# Altium PCB bt-bezel-pvt2a_final_mp.PcbDoc
Units mm, origin at the board's own origin, x right, y up, seen from the top; angles counter-clockwise.
Board outline 65.7 x 134.7 mm, 2 copper layers (Top Layer, Bottom Layer), stack 1.571 mm thick; 5 components, 3 nets, 246 pads, 2 vias.
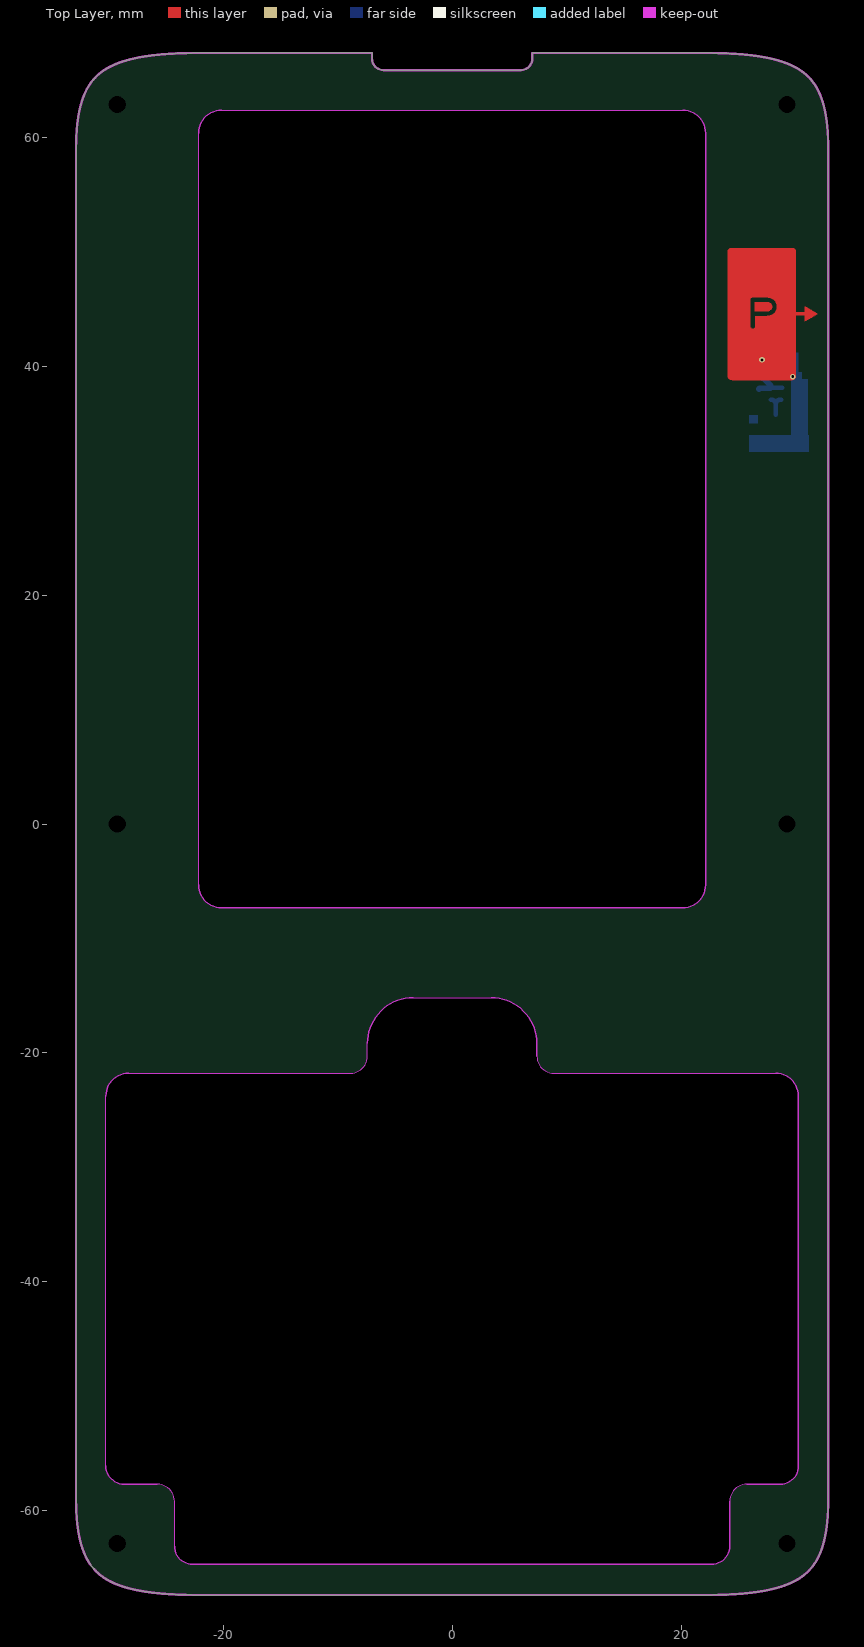
[diagram p0: Top Layer view]
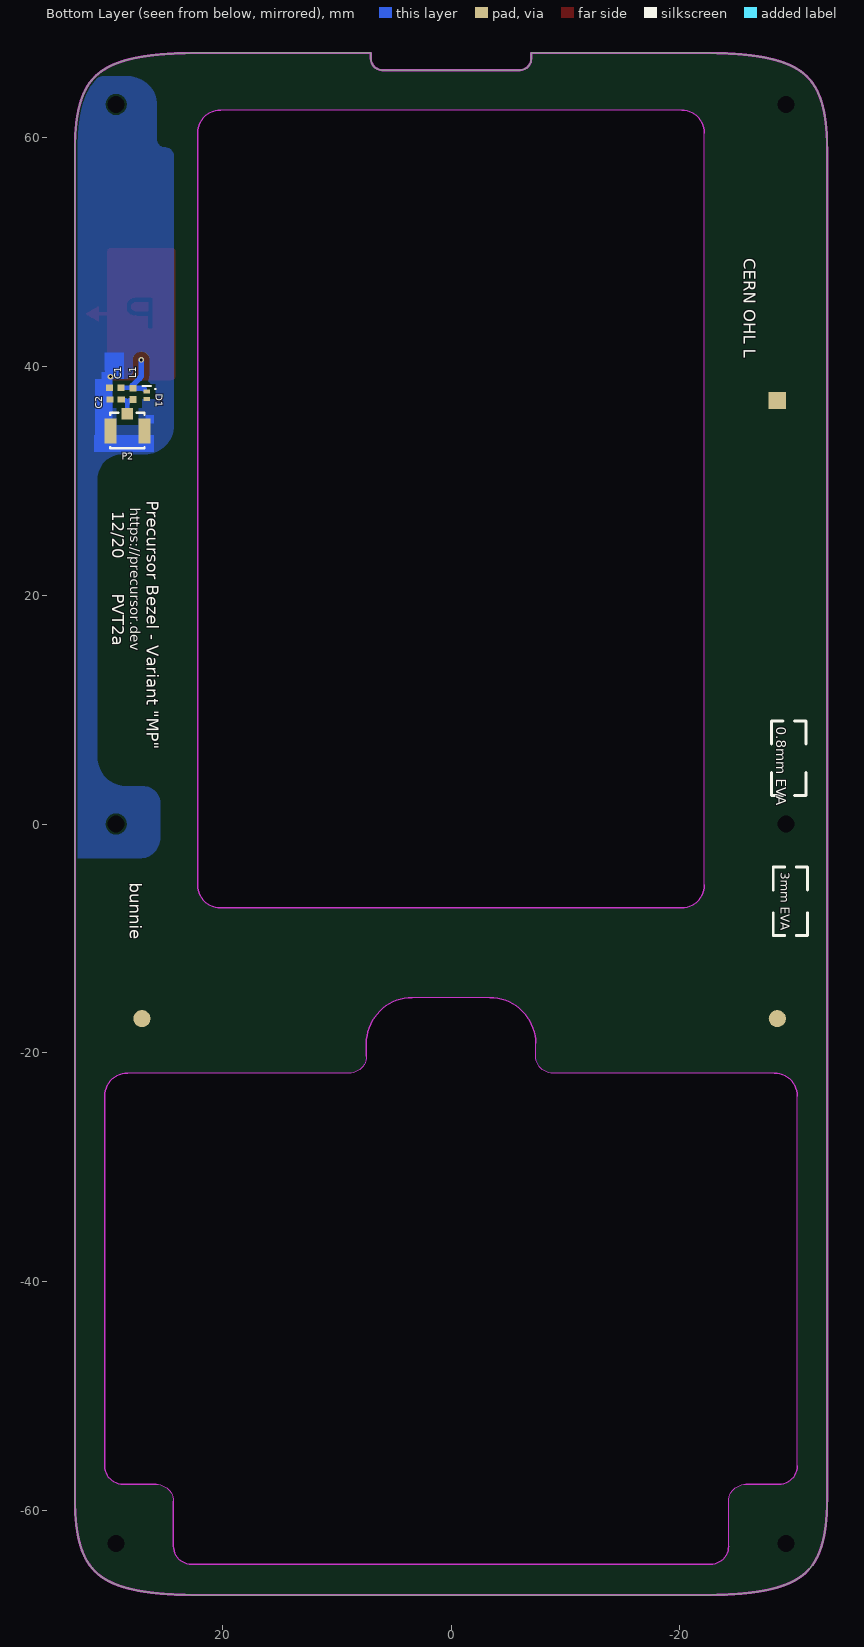
[diagram p1: Bottom Layer view, seen from below]

## Layer stack, top to bottom
Top Layer: signal copper 0.0356
Light blocking FR-4: dielectric 1.5, FR-4, Dk 4.8
Bottom Layer: signal copper 0.0356
Bottom Solder: solder mask 0.0102, Solder Resist, Dk 3.5

## Board outline
1504 vertices, not listed, extent -32.85,-67.35 32.85,67.35
cut-out: -22.136,-5.322 -22.136,60.35 cw(c-20.136,60.35) -20.136,62.35 20.136,62.35 cw(c20.136,60.35) 22.136,60.35 22.136,-5.322 cw(c20.136,-5.322) 20.136,-7.322 -20.136,-7.322 cw(c-20.136,-5.322)
cut-out: -24.25,-63.07 -24.25,-59.17 ccw(c-25.75,-59.17) -25.75,-57.67 -28.65,-57.67 cw(c-28.65,-56.07) -30.25,-56.07 -30.25,-23.77 cw(c-28.25,-23.77) -28.25,-21.77 -8.9,-21.77 ccw(c-8.9,-20.27) -7.4,-20.27 -7.4,-19.17 cw(c-3.4,-19.17) -3.4,-15.17 3.4,-15.17 cw(c3.4,-19.17) 7.4,-19.17 7.4,-20.27 ccw(c8.9,-20.27) 8.9,-21.77 28.25,-21.77 cw(c28.25,-23.77) 30.25,-23.77 30.25,-56.07 cw(c28.65,-56.07) 28.65,-57.67 25.75,-57.67 ccw(c25.75,-59.17) 24.25,-59.17 24.25,-63.07 cw(c22.65,-63.07) 22.65,-64.67 -22.65,-64.67 cw(c-22.65,-63.07)

## Design rules (kind name [scope] priority, off if disabled: settings)
Clearance Clearance_1 [InNetClass('RF') vs InNet('GND')] p1: gap=0.45 ignorepadtopadclearanceinfootprint=FALSE except(0: Arc-Hole Track-Hole SMDPad-Hole THPad-Hole Via-Hole Fill-Hole Poly-Hole Region-Hole Text-Hole)
Clearance [All] p2: gap=0.15 ignorepadtopadclearanceinfootprint=FALSE except(0: Arc-Hole Track-Hole SMDPad-Hole THPad-Hole Via-Hole Fill-Hole Poly-Hole Region-Hole Text-Hole)
ComponentClearance [All] p1 off: gap=0.254 collisioncheckmode=3 verticalgap=0.254 showdistances=FALSE
Height [All] p1 off: minheight=0 maxheight=25.4 prefheight=12.7
PolygonConnect [All] p1: connectstyle=Direct reliefconductorwidth=0.254 reliefentries=4 polygonreliefangle="90 Angle" airgapwidth=0.254
RoomDefinition connectors [InComponentClass('connectors')] p1 off: confinementstyle=ConfineIn formatcopy=TRUE lockcomponents=FALSE outline 34.001,-65.945 33.5,-65.945 33.5,-39.945 34.001,-39.945
RoutingVias [All] p1: holewidth=0.25 width=0.5 viastyle="Through Hole" minholewidth=0.25 minwidth=0.5 maxholewidth=0.5 maxwidth=1
SilkToSilkClearance [All] p1 off: silktosilkclearance=0.254
SolderMaskExpansion [All] p1: expansion=0.102 istentingtop=FALSE
Width [All] p1: maxlimit=5 minlimit=0.15 preferedwidth=0.15 minimp=50.000000 maximp=50.000000 favimp=50.000000
27 further rules are at their usual default settings.

## Classes and differential pairs
net class RF: ANT1 FEED1
component class connectors: C1 C2 D1 P2

## Components (designator, comment, footprint, x,y, rotation, side; value= is the part's Value field where it differs from the comment)
C1 "3.9pF, NP0" B_CAP0402 29.335,38.111 r0 bottom
C2 "3.3pF, NP0" B_CAP0402 29.3,37.075 r0 bottom
D1 "TPD1E01B04DPYT" TI_PX1SON-N2 26.575,37.45 r270 bottom
L1 "1.0nH" B_IND0402 27.775,37.575 r270 bottom
P2 "U.FL-R-SMT-1(10)" HRS_U.FL 28.266,34.316 r0 bottom

## Footprints (in the part's own frame and the unit in brackets; to place one, negate y for a bottom-side part, rotate by r counter-clockwise, add the part's x,y. Pads: shape width x height; smd on the part's side, far side on the other; paste and mask are expansions set on the pad)
B_CAP0402 [mm] "Capacitor 0402"
  rect 0.63x0.55 smd mask+0.07: 1(-0.5,0) 2(0.5,0)
  body extent -0.53,-0.27 0.53,0.28, height 0.4
B_IND0402 [mm] "Inductor 0402"
  rect 0.58x0.64 smd: 1(-0.49,0) 2(0.49,0)
  body extent -0.55,-0.3 0.55,0.3, height 0.6
HRS_U.FL [mm] "6 GHz U.FL connector (ISM band antennas)"
  rect 1.05x2.2 smd: GND(-1.475,0) GND(1.475,0)
  rect 1x1 smd: SIG(0,-1.5)
  silkscreen extent -1.5,-1.6 1.5,1.5, body extent -1.5,-1.6 1.5,1.5, height 1.24
TI_PX1SON-N2 [mm] "TI 0402 SON diode footprint"
  rect 0.35x0.6 smd mask+0.05: 1(0.325,0) 2(-0.325,0)
  silkscreen extent -0.8,-0.34 -0.5,0.8, body extent -0.55,-0.35 0.55,0.35, height 0.45

## Part data
C1: library part "Cap Semi", "Capacitor (Semiconductor SIM Model)", MPN=CL05C3R9CB5NNNC, MYPN=C-3p9-50-NP0-0402, VENDOR=Samsung
C2: library part "Cap Semi", "Capacitor (Semiconductor SIM Model)", MPN=GRM1555C1H3R3CA01D, MYPN=C-3p3-50-NP0-0402, VENDOR=Murata
D1: library part "D Zener", "CPDUR24V", LatestRevisionDate=17-Jul-2002, LatestRevisionNote="Re-released for DXP Platform.", MPN=TPD1E01B04DPYT, MYPN=D-TPD1E01B04DPYT, PackageDescription="Diode, Thru-Hole; 2 Leads; 0.7 in Pin Spacing", PackageReference=DIODE-0.7, Published=8-Jun-2000, Publisher="Altium Limited", VENDOR=TI
L1: library part Inductor, "Inductor", MPN=LQG15HS1N0S02D, Code_IEC=1005, Code_JEITA=0402, LatestRevisionDate=29-May-2009, LatestRevisionNote="IPC-7351 Footprint Added.", MYPN=L-1p0NH-0402, PackageDescription="Chip Inductor", PackageReference=0402-A, Published=8-Jun-2000, Publisher="Altium Limited", VENDOR=Murata
P2: library part BNC, "BNC Elbow Connector", LatestRevisionDate=17-Jul-2002, LatestRevisionNote="Re-released for DXP Platform.", MPN=U.FL-R-SMT-1(10), MYPN=J-U.FL-SMT, Publisher="Altium Limited", VENDOR=HRS

## Free pads (board coordinates)
  round 1 hole 1.5 unplated mask+0.07: 0(-29.25,-62.85) 0(-29.25,0) 0(-29.25,62.85) 0(29.25,-62.85) 0(29.25,0) 0(29.25,62.85)
  rect 1.5x1.5 smd far side mask+1.5: 0(-28.5,37)
  rect 0.051x0.864 on Bottom Overlay: 1(-31.501,53.058) 1(-30.434,55.141) 1(-30.434,50.975) 1(-25.506,50.975) 1(-25.506,55.141)
  rect 0.051x0.965 on Bottom Overlay: 1(-31.45,53.058) 1(-31.399,53.058) 1(-31.348,53.058) 1(-30.383,50.975) 1(-30.383,55.141)
  rect 0.051x1.016 on Bottom Overlay: 1(-31.297,53.033) 1(-25.557,51.001) 1(-25.557,55.115)
  rect 0.051x1.067 on Bottom Overlay: 1(-31.247,53.058) 1(-31.196,53.058) 1(-31.145,53.058) 1(-31.094,53.058) 1(-31.043,53.058)
  rect 0.051x1.118 on Bottom Overlay: 1(-30.993,53.033) 1(-30.332,51.001) 1(-30.332,55.115) 1(-25.608,51.001) 1(-25.608,55.115)
  rect 0.051x1.168 on Bottom Overlay: 1(-30.942,53.058) 1(-30.891,53.058) 1(-30.84,53.058) 1(-30.789,53.058)
  rect 0.051x0.102 on Bottom Overlay: 1(-30.739,50.899) 1(-30.739,55.217) 1(-25.506,54.15) 1(-25.506,51.966)
  rect 0.051x1.219 on Bottom Overlay: 1(-30.739,53.033) 1(-30.281,55.115) 1(-30.281,51.001)
  rect 0.051x0.254 on Bottom Overlay: 1(-30.688,50.924) 1(-30.688,55.192) 1(-25.557,51.94) 1(-25.557,54.176) 1(-25.252,50.924) 1(-25.252,55.192)
  rect 0.051x1.27 on Bottom Overlay: 1(-30.688,53.058) 1(-30.637,53.058) 1(-30.586,53.058) 1(-30.535,53.058)
  rect 0.051x0.356 on Bottom Overlay: 1(-30.637,50.924) 1(-30.637,55.192) 1(-25.608,54.226) 1(-25.608,51.89) 1(-25.303,50.924)
  rect 0.051x0.457 on Bottom Overlay: 1(-30.586,50.924)
  rect 0.051x0.508 on Bottom Overlay: 1(-30.586,55.166) 1(-25.354,50.95) 1(-25.354,55.166)
  rect 0.051x0.61 on Bottom Overlay: 1(-30.535,50.95) 1(-30.535,55.166) 1(-25.405,50.95)
  rect 0.051x1.473 on Bottom Overlay: 1(-30.485,53.058)
  rect 0.051x0.762 on Bottom Overlay: 1(-30.485,55.141) 1(-25.455,50.975) 1(-25.455,55.141)
  rect 0.051x0.711 on Bottom Overlay: 1(-30.485,50.95)
  rect 0.051x1.727 on Bottom Overlay: 1(-30.434,53.033) 1(-26.624,54.506) 1(-26.624,51.61) 1(-26.573,51.61) 1(-26.573,54.506) 1(-26.522,54.506) 1(-26.471,51.559) 1(-26.471,54.557) 1(-26.37,54.607) 1(-26.37,51.509) 1(-25.659,54.861)
  rect 0.051x1.981 on Bottom Overlay: 1(-30.383,53.058) 1(-28.859,54.531) 1(-28.859,51.585) 1(-27.081,51.534) 1(-27.081,54.582)
  rect 0.051x2.184 on Bottom Overlay: 1(-30.332,53.058)
  rect 0.051x2.489 on Bottom Overlay: 1(-30.281,53.058) 1(-27.995,50.772) 1(-27.945,50.772) 1(-27.894,50.772)
  rect 0.051x5.436 on Bottom Overlay: 1(-30.231,53.058) 1(-29.977,53.058)
  rect 0.051x5.537 on Bottom Overlay: 1(-30.18,53.058) 1(-30.078,53.058) 1(-30.027,53.058)
  rect 0.051x5.639 on Bottom Overlay: 1(-30.129,53.058)
  rect 0.051x5.334 on Bottom Overlay: 1(-29.926,53.058) 1(-29.875,53.058)
  rect 0.051x5.232 on Bottom Overlay: 1(-29.824,53.058)
  rect 0.051x5.131 on Bottom Overlay: 1(-29.773,53.058)
  rect 0.051x5.08 on Bottom Overlay: 1(-29.723,53.033)
  rect 0.051x5.029 on Bottom Overlay: 1(-29.672,53.058)
  rect 0.051x4.928 on Bottom Overlay: 1(-29.621,53.058)
  rect 0.051x4.877 on Bottom Overlay: 1(-29.57,53.033)
  rect 0.051x4.826 on Bottom Overlay: 1(-29.519,53.058) 1(-29.062,53.058) 1(-29.011,53.058)
  rect 0.051x4.724 on Bottom Overlay: 1(-29.469,53.058) 1(-29.164,53.058) 1(-29.113,53.058)
  rect 0.051x4.674 on Bottom Overlay: 1(-29.418,53.033)
  rect 0.051x4.623 on Bottom Overlay: 1(-29.367,53.058) 1(-29.316,53.058) 1(-29.265,53.058) 1(-29.215,53.058)
  rect 0.051x2.337 on Bottom Overlay: 1(-28.961,51.763) 1(-27.437,51.001) 1(-27.437,55.115)
  rect 0.051x2.286 on Bottom Overlay: 1(-28.961,54.328) 1(-28.503,55.039) 1(-28.503,51.026)
  rect 0.051x2.134 on Bottom Overlay: 1(-28.91,51.661) 1(-28.91,54.455) 1(-27.386,51.153) 1(-27.386,54.963)
  rect 0.051x1.93 on Bottom Overlay: 1(-28.808,54.607) 1(-28.808,51.509) 1(-27.183,54.658) 1(-27.132,54.607) 1(-27.132,51.509) 1(-26.878,51.61) 1(-26.878,54.506) 1(-26.827,54.506) 1(-26.827,51.61) 1(-25.811,51.204) 1(-25.811,54.912)
  rect 0.051x1.88 on Bottom Overlay: 1(-28.757,51.483) 1(-28.757,54.633) 1(-28.707,51.432) 1(-27.335,51.331) 1(-27.335,54.785) 1(-27.183,51.432) 1(-26.776,51.585) 1(-26.776,54.48) 1(-26.065,51.331) 1(-25.963,51.28) 1(-25.963,54.836) 1(-25.913,51.229) 1(-25.913,54.836) 1(-25.862,54.887) 1(-25.862,51.229)
  rect 0.051x1.829 on Bottom Overlay: 1(-28.707,54.658) 1(-28.656,54.709) 1(-28.656,51.407) 1(-28.605,54.76) 1(-28.605,51.356) 1(-27.284,51.356) 1(-27.284,54.709) 1(-27.233,51.407) 1(-27.233,54.709) 1(-26.725,51.61) 1(-26.725,54.506) 1(-26.675,51.61) 1(-26.675,54.506) 1(-26.167,54.709) 1(-26.116,51.356) 1(-26.116,54.76) 1(-26.065,54.76) 1(-26.014,51.305) 1(-26.014,54.811) 1(-25.76,51.204) 1(-25.76,54.912)
  rect 0.051x2.032 on Bottom Overlay: 1(-28.554,51.204) 1(-28.554,54.912) 1(-27.03,51.559) 1(-27.03,54.506) 1(-26.979,54.506) 1(-26.979,51.61) 1(-26.929,51.61) 1(-26.929,54.506)
  rect 0.051x2.54 on Bottom Overlay: 1(-28.453,50.899) 1(-28.453,55.217) 1(-28.249,50.797) 1(-28.249,55.319) 1(-28.199,50.797) 1(-28.199,55.319) 1(-28.148,50.797) 1(-28.148,55.319) 1(-28.097,50.797) 1(-28.097,55.319) 1(-28.046,55.319) 1(-28.046,50.797) 1(-27.995,55.319) 1(-27.945,55.319) 1(-27.894,55.319) 1(-27.843,55.319) 1(-27.843,50.797) 1(-27.792,50.797) 1(-27.792,55.319) 1(-27.741,50.797) 1(-27.741,55.319) 1(-27.691,50.797) 1(-27.691,55.319) 1(-27.64,50.797)
  rect 0.051x2.591 on Bottom Overlay: 1(-28.402,50.823) 1(-28.351,50.823) 1(-28.351,55.293) 1(-28.3,50.823) 1(-28.3,55.293) 1(-27.64,55.293) 1(-27.589,50.823) 1(-27.589,55.293) 1(-27.538,50.823) 1(-27.538,55.293) 1(-27.487,50.874) 1(-27.487,55.242)
  rect 0.051x2.642 on Bottom Overlay: 1(-28.402,55.268)
  rect 0.051x1.676 on Bottom Overlay: 1(-26.522,51.585) 1(-25.659,51.229)
  rect 0.051x1.778 on Bottom Overlay: 1(-26.421,51.534) 1(-26.421,54.582) 1(-26.319,51.483) 1(-26.319,54.633) 1(-26.268,54.684) 1(-26.268,51.432) 1(-26.217,54.684) 1(-26.217,51.432) 1(-26.167,51.382) 1(-25.709,54.887) 1(-25.709,51.229)
  rect 0.051x0.66 on Bottom Overlay: 1(-25.405,55.141)
  rect 0.051x0.406 on Bottom Overlay: 1(-25.303,55.166)
  rect 0.051x0.152 on Bottom Overlay: 1(-25.201,50.924) 1(-25.201,55.192)
  round 1.5 smd far side mask+1.5: 2(27,-17) 3(-28.5,-17)

## Via types
v1: diameter 0.5, hole 0.25, Top Layer to Bottom Layer, tented both sides, 2 vias

## Nets (pads, with @x,y where several pads share a name; then routed paths per layer and width w, separated by ;. In a path a pad name is that pad's centre, name@x,y a point inside that pad or via, vN(x,y) a via of type N, cw(c..) or ccw(c..) an arc to the next point about the centre after c; other vN are vias at no path point)
ANT1: C1.1 D1.2 L1.1 | length 4.6
  Bottom Layer w0.4: L1.1@27.833,38.292 27.85,38.275 L1.1@27.86,38.275 ; L1.1@27.86,38.075 27.85,38.075 cw(c27.886,38.075) 27.886,38.111 C1.1
  Bottom Layer w0.5: 26.8,38 26.865,38.065 L1.1 ; v1(27.057,40.539) 27.057,39.275 ccw(c27.557,39.275) 27.204,38.921 L1.1@27.833,38.292
  other v1: 29.75,39.075
FEED1: C2.1 L1.2 P2.SIG | length 2.3
  Bottom Layer w0.4: L1.2@27.85,37.075 cw(c27.85,36.659) 28.266,36.659 ; P2.SIG@28.266,35.759 P2.SIG 28.266,36.659 ; C2.1@28.76,37.075 28.682,37.075 ccw(c28.682,36.659) 28.266,36.659
GND: C1.2 C2.2 D1.1 P2.GND

## Polygon pours and split planes (outlines as drawn)
GND on Bottom Layer "GND_L02_P004" (solid, remove dead copper, pour order 4): 35.8,65.3 28.2,65.3 ccw(c28.2,62.8) 25.7,62.8 25.7,59.8 cw(c25,59.8) 25,59.1 ccw(c25,58.3) 24.2,58.3 24.2,34.84 ccw(c26.74,34.84) 26.74,32.3 28.7,32.3 cw(c28.7,30.1) 30.9,30.1 30.9,5.84 cw(c28.36,5.84) 28.36,3.3 26.9,3.3 ccw(c26.9,1.8) 25.4,1.8 25.4,-1.2 ccw(c27.2,-1.2) 27.2,-3 34.1,-3 ccw(c34.1,-2.5) 34.6,-2.5

## Keep-outs
Keep-Out Layer:
  drawing of 1516 lines, arcs and shapes, not listed

## Other copper
Top Layer:
  region: 27.582,45.554 27.671,45.554 27.671,45.525 27.731,45.525 27.731,45.495 27.791,45.495 27.791,45.465 27.821,45.465 27.821,45.435 27.851,45.435 27.851,45.405 27.88,45.405 27.88,45.375 27.88,45.345 27.91,45.345 27.91,45.316 27.91,45.286 27.91,45.256 27.94,45.256 27.94,45.226 27.94,45.196 27.94,45.166 27.94,45.136 27.94,45.106 27.91,45.106 27.91,45.077 27.91,45.047 27.91,45.017 27.88,45.017 27.88,44.987 27.851,44.987 27.851,44.957 27.851,44.927 27.821,44.927 27.821,44.897 27.761,44.897 27.761,44.868 27.731,44.868 27.731,44.838 27.641,44.838 27.641,44.808 27.552,44.808 27.552,44.778 26.447,44.778 26.447,44.808 26.447,44.838 26.447,44.868 26.447,44.897 26.447,44.927 26.447,44.957 26.447,44.987 26.447,45.017 26.447,45.047 26.447,45.077 26.447,45.106 26.447,45.136 26.447,45.166 26.447,45.196 26.447,45.226 26.447,45.256 26.447,45.286 26.447,45.316 26.447,45.345 26.447,45.375 26.447,45.405 26.447,45.435 26.447,45.465 26.447,45.495 26.447,45.525 26.447,45.554 26.447,45.584 27.582,45.584
  region net ANT1: 916 vertices and 1 holes, not listed, extent 24.087,38.775 31.883,50.303
  region: -19.2,-2.9
  region: -19.2,-2.9
  region: -19.2,-2.9
  region: -14.708,-11.763
  region: -14.708,-11.763
  region: -14.708,-11.763
Bottom Layer:
  rectangle net GND: 25.95,34.975 26.7,35.725
  rectangle net GND: 25.925,32.475 31.175,33.975
  rectangle net GND: 28.55,38.875 30.25,41.175
  rectangle net GND: 29.585,32.481 31.085,38.881
  rectangle net GND: 29.65,38.175 30.55,39.475

## Silkscreen, mask and mechanical layers (free items; w line width, h text height)
Bottom Overlay:
  lines w0.25: -31.15,-7.75 -31.15,-9.75 -30.15,-9.75 ; -31.15,-5.75 -31.15,-3.75 -30.15,-3.75 ; -31,4.5 -31,2.5 -30,2.5 ; -31,7 -31,9 -30,9 ; -29.15,-9.75 -28.15,-9.75 -28.15,-7.75 ; -29.15,-3.75 -28.15,-3.75 -28.15,-5.75 ; -29,2.5 -28,2.5 -28,4.5 ; -29,9 -28,9 -28,7
  text "CERN OHL L" at -25.2,49.4 h1.8 r90
  text "Precursor Bezel - Variant \"MP\"" at 26.925,28.225 h1.8 r90
  text "https://precursor.dev" at 28.325,27.625 h1.5 r90
  text "12/20" at 29.925,27.325 h1.8 r90
  text "PVT2a" at 29.925,20.125 h1.8 r90
  text "0.8mm EVA" at -28.095,8.475 h1.5 r90
  text "3mm EVA" at -28.55,-4.225 h1.3 r90
  text "bunnie" at 28.4,-5.15 h1.8 r90
Bottom Solder:
  rectangle: 25.9,-2.4 32.9,2.3
  rectangle: 31.7,1.8 32.9,58.3
Mechanical 1:
  circle w0.1: c-29.25,-62.85 r0.75
  circle w0.1: c-29.25,0 r0.75
  circle w0.1: c29.25,0 r0.75
  circle w0.1: c29.25,62.85 r0.75
  circle w0.1: c-29.25,62.85 r0.75
  circle w0.1: c29.25,-62.85 r0.75
  lines w0.1: -12.8,-13.141 -5.5,-13.141 -5.5,-14.304 ccw(c-3.4,-19.17) -7.961,-16.47 -12.461,-16.47 ccw(c-12.461,-17.47) -13.461,-17.47 -13.461,-20.47 -28.25,-20.47 ccw(c-28.25,-23.77) -31.55,-23.77 -31.55,-59.55 ccw(c-30.55,-59.55) -30.55,-60.55 -26.55,-60.55 cw(c-26.55,-61.55) -25.55,-61.55 -25.55,-64.97 ccw(c-24.55,-64.97) -24.55,-65.97 24.55,-65.97 ccw(c24.55,-64.97) 25.55,-64.97 25.55,-61.55 cw(c26.55,-61.55) 26.55,-60.55 30.55,-60.55 ccw(c30.55,-59.55) 31.55,-59.55 31.55,-23.77 ccw(c28.25,-23.77) 28.25,-20.47 13.461,-20.47 13.461,-17.47 ccw(c12.461,-17.47) 12.461,-16.47 7.961,-16.47 ccw(c3.4,-19.17) 5.5,-14.304 5.5,-13.141 9.25,-13.141 9.25,-14.941 ccw(c9.75,-14.941) 9.75,-15.441 12.25,-15.441 ccw(c12.25,-14.941) 12.75,-14.941 12.75,-13.141 22.846,-13.141 ccw(c24.083,-12.964) 24.26,-11.727 24.26,63.095 ccw(c24.083,64.332) 22.846,64.509 -22.532,64.509 ccw(c-23.51,63.73) -24.26,62.73 -24.26,-11.727 ccw(c-24.083,-12.964) -22.846,-13.141 -12.75,-13.141 ; -32.85,-59 -32.811,-60.349 -32.67,-61.689 -32.38,-63.01 -32.023,-63.954 -31.499,-64.824 -30.797,-65.553 -29.952,-66.111 -28.441,-66.703 -26.854,-67.046 -25.241,-67.234 -23.623,-67.325 -22,-67.35 22,-67.35 23.629,-67.325 25.253,-67.233 26.871,-67.043 28.461,-66.698 29.975,-66.099 30.819,-65.535 31.522,-64.794 32.038,-63.922 32.393,-62.968 32.674,-61.665 32.811,-60.34 32.85,-59 32.85,59 32.811,60.349 32.67,61.689 32.38,63.01 32.023,63.954 31.499,64.824 30.797,65.553 29.952,66.111 28.441,66.703 26.854,67.046 25.241,67.234 23.623,67.325 22,67.35 7,67.35 7,66.85 cw(c6,66.85) 6,65.85 -6,65.85 cw(c-6,66.85) -7,66.85 -7,67.35 -22,67.35 -23.629,67.325 -25.253,67.233 -26.871,67.043 -28.461,66.698 -29.975,66.099 -30.819,65.535 -31.522,64.794 -32.038,63.922 -32.393,62.968 -32.674,61.665 -32.811,60.34 -32.85,59 -32.85,-59 ; -30.25,-56.07 ccw(c-28.65,-56.07) -28.65,-57.67 -25.75,-57.67 cw(c-25.75,-59.17) -24.25,-59.17 -24.25,-63.07 ccw(c-22.65,-63.07) -22.65,-64.67 22.65,-64.67 ccw(c22.65,-63.07) 24.25,-63.07 24.25,-59.17 cw(c25.75,-59.17) 25.75,-57.67 28.65,-57.67 ccw(c28.65,-56.07) 30.25,-56.07 30.25,-23.77 ccw(c28.25,-23.77) 28.25,-21.77 8.9,-21.77 cw(c8.9,-20.27) 7.4,-20.27 7.4,-19.17 ccw(c3.4,-19.17) 3.4,-15.17 -3.4,-15.17 ccw(c-3.4,-19.17) -7.4,-19.17 -7.4,-20.27 cw(c-8.9,-20.27) -8.9,-21.77 -28.25,-21.77 ccw(c-28.25,-23.77) -30.25,-23.77 -30.25,-56.07 ; -22.136,-5.322 ccw(c-20.136,-5.322) -20.136,-7.322 20.136,-7.322 ccw(c20.136,-5.322) 22.136,-5.322 22.136,60.35 ccw(c20.136,60.35) 20.136,62.35 -20.136,62.35 ccw(c-20.136,60.35) -22.136,60.35 -22.136,-5.322
  lines w0.2: 21.6,-9.4 40.5,-3.4
  text "1mm step milling around this surface on back side" at 41.4,-9.158 h1.5
Mechanical 2:
  drawing of 168 lines, arcs and shapes, not listed
  text "Chamfer 30 degree / 0.5mm from top side" at -103,69.601 h1.5
  text "Chamfer 15 degree / 1mm from top side" at 40.5,-31.549 h1.5
Dimensions:
  drawing of 213 lines, arcs and shapes, not listed
  text "Profile of cross section line C-C, showing countersink hole and back mill" at -47,98.081 h1.5
  text "Profile of cross section line B-B, showing 30 degree chamfer from top and 1mm back-mill" at -48.2,76.981 h1.5
  text "Note: 6x countersink hole 45 degree, see section C-C" at 41.6,72.781 h1.5
  text "Layer" at 50.288,57.096 h1.52
  text "Name" at 60.7,57.096 h1.52
  text "Material" at 91.679,57.096 h1.52
  text "Thickness" at 113.517,57.096 h1.52
  text "Constant" at 130.023,57.096 h1.52
  text "Board Layer Stack" at 144.497,57.096 h1.52
  text "C" at -43.284,54.913 h3.5
  text "C" at 40.034,54.913 h3.5
  text "1" at 50.288,54.048 h1.52
  text "Top Layer" at 60.7,54.048 h1.52
  text "0.036mm" at 113.517,54.048 h1.52
  text "Light blocking FR-4" at 60.7,51 h1.52
  text "FR-4" at 91.679,51 h1.52
  text "1.500mm" at 113.517,51 h1.52
  text "4.8" at 130.023,51 h1.52
  text "2" at 50.288,47.952 h1.52
  text "Bottom Layer" at 60.7,47.952 h1.52
  text "0.036mm" at 113.517,47.952 h1.52
  text "Bottom Solder" at 60.7,44.904 h1.52
  text "Solder Resist" at 91.679,44.904 h1.52
  text "0.010mm" at 113.517,44.904 h1.52
  text "3.5" at 130.023,44.904 h1.52
  text "Bottom Overlay" at 60.7,41.856 h1.52
  text "Finish: immersion gold" at 50.8,35.2 h1.5
  text "Top side no solder mask or silkscreen" at 50.7,28.581 h1.5
  text "Bottom side clear soldermask, light gray silkscreen" at 51.1,23.581 h1.5
  text "B" at -42.485,22.84 h3.5
  text "B" at 39.806,22.84 h3.5
  text "Please see .GM1 and .GM2 for chamfer and step-milling instructions" at 50.8,16.562 h1.5
  text "A" at -42.866,-43.045 h3.5
  text "A" at 40.815,-43.045 h3.5
  text "Profile of cross section line A-A, showing 15 degree chamfer from top + 1mm back-mill" at -35.7,-85.719 h1.5
Route Tool Path:
  drawing of 1516 lines, arcs and shapes, not listed
  text "board outline" at -9.6,-72.999 h1.5
PVT2a-case:
  drawing of 592 lines, arcs and shapes, not listed

## Dimensions
-30.5,94.919 to -30,94.419 on Dimensions
-28.5,94.419 to -28,94.919 on Dimensions
-28.5,93.419 to -30,93.419 on Dimensions
-28,94.919 to -30.5,94.919 on Dimensions
-31.25,-74.026 to -30.25,-74.294 on Dimensions
-22.636,74.68 to -22.136,74.391 on Dimensions
-32.85,73.18 to -32.85,74.68 on Dimensions
-24.234,73.18 to -24.234,74.18 on Dimensions
-24.234,74.18 to -22.136,74.18 on Dimensions
-31.55,-75.526 to -30.25,-74.526 on Dimensions
-32.85,-75.526 to -32.85,-74.026 on Dimensions
-30.25,-74.526 to -31.55,-75.526 on Dimensions